# Altium PCB DecodeBufferLatch.PcbDoc
Units mil, origin at the board's own origin, x right, y up, seen from the top; angles counter-clockwise.
Board outline 9055.12 x 3937.01 mil, 2 copper layers (Top Layer, Bottom Layer); 89 components, 61 nets, 309 pads, 40 vias.
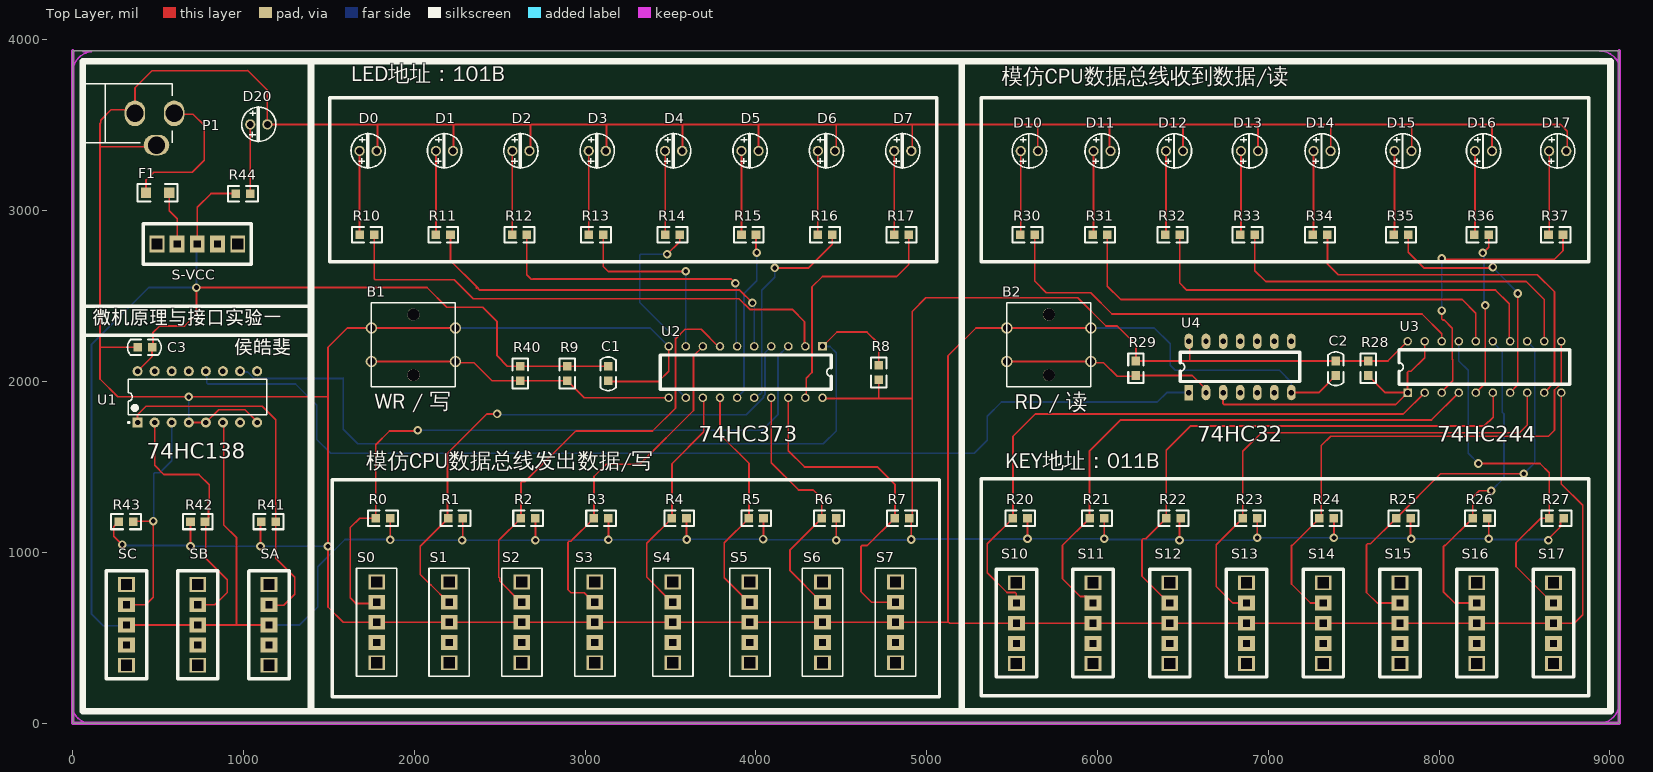
[diagram p0: Top Layer view]
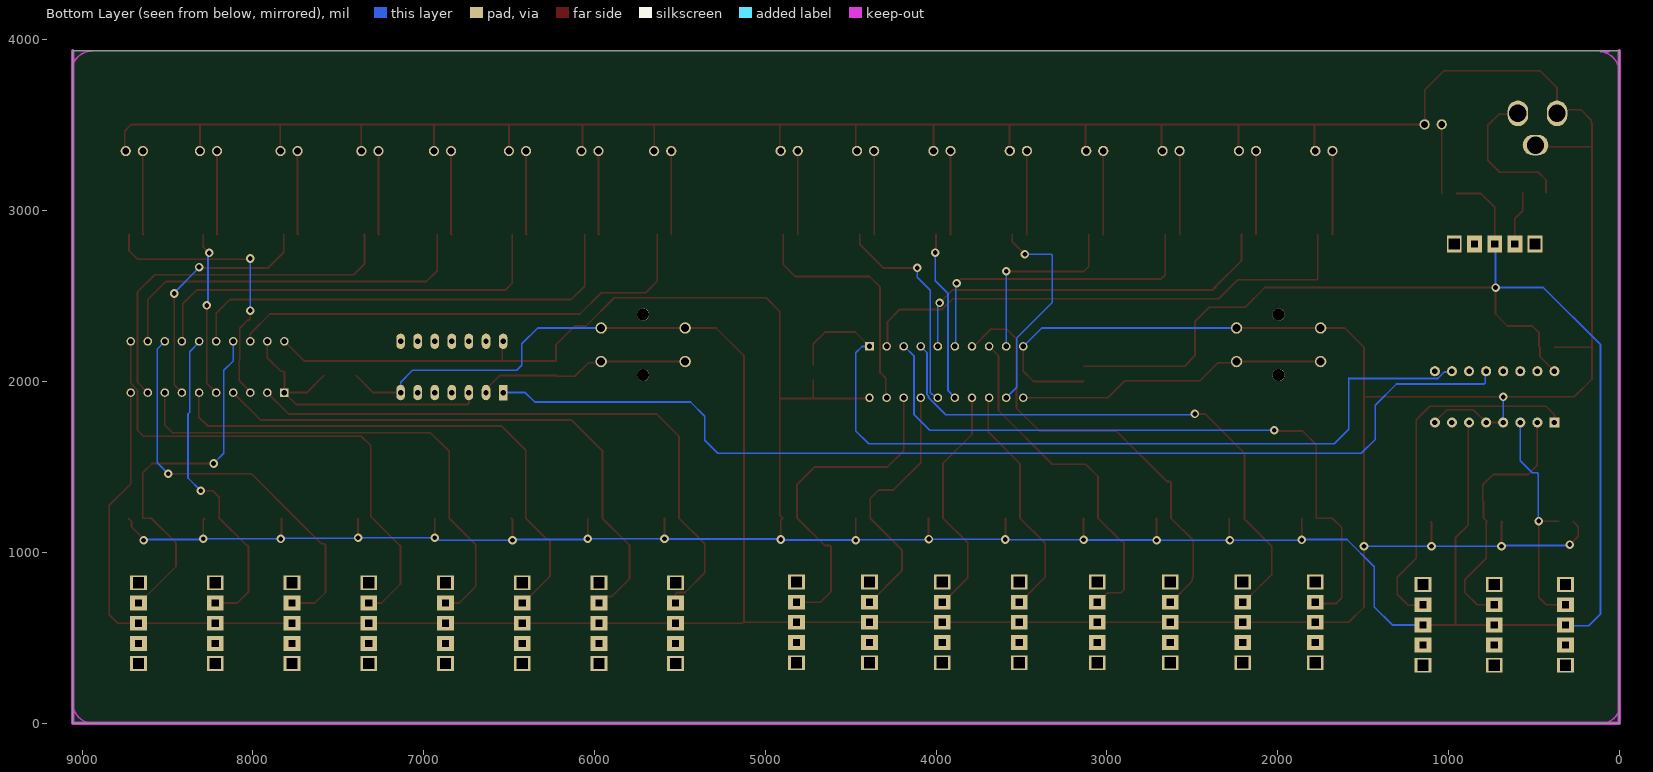
[diagram p1: Bottom Layer view, seen from below]

## Layer stack, top to bottom
Top Solder: solder mask 0.4, Solder Resist, Dk 3.5
Top Layer: signal copper 1.4
Dielectric1: dielectric 12.6, FR-4, Dk 4.8
Bottom Layer: signal copper 1.4
Bottom Solder: solder mask 0.4, Solder Resist, Dk 3.5

## Board outline
0,0 0,3937.01 9055.12,3937.01 9055.12,0

## Design rules (kind name [scope] priority, off if disabled: settings)
Clearance nploy [InPolygon] p1: gap=10 ignorepadtopadclearanceinfootprint=FALSE except(0: Arc-Hole Track-Hole SMDPad-Hole THPad-Hole Via-Hole Fill-Hole Poly-Hole Region-Hole Text-Hole)
Clearance [All] p2: gap=8 ignorepadtopadclearanceinfootprint=FALSE except(0: Arc-Hole Track-Hole SMDPad-Hole THPad-Hole Via-Hole Fill-Hole Poly-Hole Region-Hole Text-Hole)
HoleSize [All] p1: absolutevalues=TRUE maxlimit=500 minlimit=1 maxpercent=80.000 minpercent=20.000
MinimumSolderMaskSliver [All] p1: minsoldermaskwidth=0
PolygonConnect [All] p1: connectstyle=Relief reliefconductorwidth=10 reliefentries=4 polygonreliefangle="90 Angle" airgapwidth=10
RoutingCorners [All] p1: cornerstyle=45-Degree minsetback=200 maxsetback=200
RoutingVias [All] p1: holewidth=20 width=35 viastyle="Through Hole" minholewidth=10 minwidth=10 maxholewidth=30 maxwidth=50
SilkToSilkClearance [All] p1: silktosilkclearance=0
SilkToSolderMaskClearance SilkscreenOverComponentPads [IsPad] p1: minsilkscreentomaskgap=0 clearancetoexposedcopper=TRUE
SolderMaskExpansion [All] p1: expansion=4 istentingtop=FALSE
Width [All] p1: maxlimit=50 minlimit=8 preferedwidth=10
25 further rules are at their usual default settings.

## Components (designator, comment, footprint, x,y, rotation, side; value= is the part's Value field where it differs from the comment)
B1 "SW-SPST" KEY_RESET 1995,2215 r0 top
B2 "SW-SPST" KEY_RESET 5715,2215 r0 top
C1 "104" 0805C 3130,2005 r90 top
C2 "104" 0805C 7390,2035 r90 top
C3 "104" 0805C 380,2205 r0 top
D0 "LED" LED1 1680,3350 r0 top
D1 "LED" LED1 2127.14,3350 r0 top
D2 "LED" LED1 2574.29,3350 r0 top
D3 "LED" LED1 3021.43,3350 r0 top
D4 "LED" LED1 3468.57,3350 r0 top
D5 "LED" LED1 3915.71,3350 r0 top
D6 "LED" LED1 4362.86,3350 r0 top
D7 "LED" LED1 4810,3350 r0 top
D10 "LED" LED1 5550.81,3349.14 r0 top
D11 "LED" LED1 5976.57,3349.14 r0 top
D12 "LED" LED1 6400.59,3349.14 r0 top
D13 "LED" LED1 6839.73,3349.14 r0 top
D14 "LED" LED1 7264.79,3349.14 r0 top
D15 "LED" LED1 7738.05,3349.14 r0 top
D16 "LED" LED1 8209.76,3349.14 r0 top
D17 "LED" LED1 8644,3349.14 r0 top
D20 "LED" LED1 1040,3505 r0 top
F1 "Fuse1A" 1206 565,3105 r180 top
P1 "DC5V_JACK" DCJACK 594,3570 r90 top locked
R0 "10K" 0805 1780,1200 r0 top
R1 "10K" 0805 2204.43,1200 r0 top
R2 "10K" 0805 2629.64,1200 r0 top value=10k
R3 "10K" 0805 3056.88,1200 r0 top value=10k
R4 "10K" 0805 3513.78,1200 r0 top value=10k
R5 "10K" 0805 3964.49,1200 r0 top value=10k
R6 "10K" 0805 4390.22,1200 r0 top value=10k
R7 "10K" 0805 4817.45,1200 r0 top value=10k
R8 "10K" 0805 4720,2090 r270 top
R9 "10K" 0805 2895,2010 r90 top
R10 "330R" 0805 1760,2860 r180 top
R11 "330R" 0805 2207.14,2860 r180 top
R12 "330R" 0805 2654.29,2860 r180 top
R13 "330R" 0805 3101.43,2860 r180 top
R14 "330R" 0805 3548.57,2860 r180 top
R15 "330R" 0805 3995.71,2860 r180 top
R16 "330R" 0805 4442.86,2860 r180 top
R17 "330R" 0805 4890,2860 r180 top
R20 "10K" 0805 5510,1200 r0 top
R21 "10K" 0805 5958.57,1200 r0 top
R22 "10K" 0805 6407.14,1200 r0 top value=10k
R23 "10K" 0805 6855.71,1200 r0 top value=10k
R24 "10K" 0805 7304.29,1200 r0 top value=10k
R25 "10K" 0805 7752.86,1200 r0 top value=10k
R26 "10K" 0805 8201.43,1200 r0 top value=10k
R27 "10K" 0805 8650,1200 r0 top value=10k
R28 "10K" 0805 7585,2040 r90 top
R29 "10K" 0805 6225,2040 r90 top
R30 "330R" 0805 5626.85,2860 r180 top
R31 "330R" 0805 6052.61,2860 r180 top
R32 "330R" 0805 6476.63,2860 r180 top
R33 "330R" 0805 6915.77,2860 r180 top
R34 "330R" 0805 7340.84,2860 r180 top
R35 "330R" 0805 7814.09,2860 r180 top
R36 "330R" 0805 8285.8,2860 r180 top
R37 "330R" 0805 8720.04,2860 r180 top
R40 "10K" 0805 2620,2010 r90 top
R41 "10K" 0805 1185,1180 r180 top
R42 "10K" 0805 770,1180 r180 top
R43 "10K" 0805 350,1180 r180 top value=10k
R44 "10K" 0805 960,3100 r0 top value=330R
S0 "SW-SPST" BM 1780,590 r90 top
S1 "SW-SPST" BM 2204.43,590 r90 top
S2 "SW-SPST" BM 2629.64,590 r90 top
S3 "SW-SPST" BM 3056.88,590 r90 top
S4 "SW-SPST" BM 3513.78,590 r90 top
S5 "SW-SPST" BM 3964.49,590 r90 top
S6 "SW-SPST" BM 4390.22,590 r90 top
S7 "SW-SPST" BM 4817.45,590 r90 top
S10 "SW-SPST" BM 5525,585 r90 top
S11 "SW-SPST" BM 5974.19,585 r90 top
S12 "SW-SPST" BM 6423.38,585 r90 top
S13 "SW-SPST" BM 6872.57,585 r90 top
S14 "SW-SPST" BM 7321.76,585 r90 top
S15 "SW-SPST" BM 7770.95,585 r90 top
S16 "SW-SPST" BM 8220.14,585 r90 top
S17 "SW-SPST" BM 8669.33,585 r90 top
S-VCC "SW-SPST" BM 730,2805 r180 top
SA "SW-SPST" BM 1150,575 r90 top
SB "SW-SPST" BM 732.5,575 r90 top
SC "SW-SPST" BM 315,575 r90 top
U1 "74HC138" DIP-16 730,1910 r90 top
U2 "74HC373" DIP20 4390,2205 r270 top
U3 "74HC244" DIP20 7815,1935 r90 top
U4 "74HC32" DIP14 6535,1935 r90 top

## Footprints (in the part's own frame and the unit in brackets; to place one, negate y for a bottom-side part, rotate by r counter-clockwise, add the part's x,y. Pads: shape width x height; smd on the part's side, far side on the other; paste and mask are expansions set on the pad)
0805 [mil]
  rect 50x50 smd: 1(-5,0) 2(80,0)
  silkscreen extent -50,-45 125,45
0805C [mil]
  rect 50x50 smd: 1(0,-5) 2(85,-5)
  silkscreen extent -59,-50 139,40
1206 [mil]
  rect 60x63.94 smd: 1(0,0) 2(135,0)
  silkscreen extent -50,-50 185,50
BM [mm]
  rect 2.2x2.5 hole 1 square: 1(0,0) 2(3,0) 3(-3,0)
  rect 2.2x2.5 hole 1.6 square: 4(-6,0) 5(6,0)
  silkscreen extent -8,-3 8.05,3
DCJACK [mil]
  oval 150x120 hole 102: 1(0,0) 2(0,229)
  oval 120x150 hole 102: 3(-186,103)
  silkscreen extent -173,12 173,531
DIP14 [mil] "14脚300mil直插集成电路（蒜米工坊）"
  rect 90x50 hole 32: 1(0,0)
  oval 90x50 hole 32: 2(0,-100) 3(0,-200) 4(0,-300) 5(0,-400) 6(0,-500) 7(0,-600) 8(300,-600) 9(300,-500) 10(300,-400) 11(300,-300) 12(300,-200) 13(300,-100) 14(300,0)
  silkscreen extent 65,-650 235,50
DIP20 [mil]
  rect 50x50 hole 32: 1(0,0)
  round 50 hole 32: 2(0,-100) 3(0,-200) 4(0,-300) 5(0,-400) 6(0,-500) 7(0,-600) 8(0,-700) 9(0,-800) 10(0,-900) 11(300,-900) 12(300,-800) 13(300,-700) 14(300,-600) 15(300,-500) 16(300,-400) 17(300,-300) 18(300,-200) 19(300,-100) 20(300,0)
  silkscreen extent 50,-950 250,50
DIP-16 [mm] "DIP; 16 Leads; Row Spacing 7.62 mm; Pitch 2.54 mm"
  rect 1.5x1.5 hole 0.813: 1(-3.81,8.89)
  round 1.5 hole 0.813: 2(-3.81,6.35) 3(-3.81,3.81) 4(-3.81,1.27) 5(-3.81,-1.27) 6(-3.81,-3.81) 7(-3.81,-6.35) 8(-3.81,-8.89) 9(3.81,-8.89) 10(3.81,-6.35) 11(3.81,-3.81) 12(3.81,-1.27) 13(3.81,1.27) 14(3.81,3.81) 15(3.81,6.35) 16(3.81,8.89)
  silkscreen extent -3.93,-10.3 2.65,10.31, body extent -3.6,-10.28 3.6,10.28, height 5.08
KEY_RESET [mm] "12mmx12mmx7mm微动拨码开关"
  round 1.7 hole 1.2: 1(-6.25,2.5) 1(6.25,2.5) 2(-6.25,-2.5) 2(6.25,-2.5)
  round 1.8 hole 1.8: ""(0,-4.5) ""(0,4.5)
  silkscreen extent -6.25,-6.25 6.25,6.25
LED1 [mil]
  round 60 hole 40: 1(0,0) 2(100,0)
  silkscreen extent -50,-99 150,101

## Part data
B1 B2 S0 S1 S2 S3 S4 S5 S6 S7 S10 S11 S12 S13 S14 S15 S16 S17 S-VCC SA SB SC: "Single-Pole, Single-Throw Switch", LatestRevisionDate=17-Jul-2002, LatestRevisionNote="Re-released for DXP Platform.", PackageDescription="Switch; 2 Leads", PackageReference=SPST-2, Published=24-Mar-1999, Publisher="Altium Limited"
C1 C2 C3: library part Cap, "Capacitor", LatestRevisionDate=17-Jul-2002, LatestRevisionNote="Re-released for DXP Platform.", PackageReference=RAD-0.3, Published=8-Jun-2000, Publisher="Altium Limited"
D0 D1 D2 D3 D4 D5 D6 D7 D10 D11 D12 D13 D14 D15 D16 D17 D20: library part "Diode 1N4148", "High Conductance Fast Diode", Code_JEDEC=DO-204-AH, ComponentLink1Description="Manufacturer Link", ComponentLink1URL=http://www.fairchildsemi.com/, ComponentLink2Description=Datasheet, ComponentLink2URL=http://www.fairchildsemi.com/ds/1N%2F1N4148.pdf, DatasheetVersion=1997, LatestRevisionDate=17-Jul-2002, LatestRevisionNote="Re-released for DXP Platform.", PackageDescription="Diode, Axial; Body 3.8 x 1.9 mm (LxDia. max), Lead Dia. 0.53 mm (max)", PackageReference=DO-35, Published=8-Jun-2000, Publisher="Altium Limited"
F1: library part "Fuse 1", "Fuse", LatestRevisionDate=17-Jul-2002, LatestRevisionNote="Re-released for DXP Platform.", PackageDescription="Thru-Hole; 2 Leads", PackageReference=PIN-W2/E2.8, Published=8-Jun-2000, Publisher="Altium Limited"
P1: library part "Header 3", "Header, 3-Pin", LatestRevisionDate=17-Jul-2002, LatestRevisionNote="Re-released for DXP Platform.", Publisher="Altium Limited"
R0 R1 R2 R3 R4 R5 R6 R7 R8 R9 R10 R11 R12 R13 R14 R15 R16 R17 R20 R21 R22 R23 R24 R25 R26 R27 R28 R29 R30 R31 R32 R33 R34 R35 R36 R37 R40 R41 R42 R43 R44: library part Res1, "Resistor", LatestRevisionDate=17-Jul-2002, LatestRevisionNote="Re-released for DXP Platform.", PackageDescription="Axial Device, Thru-Hole; 2 Leads; 0.3 in Pin Spacing", PackageReference=AXIAL-0.3, Published=8-Jun-2000, Publisher="Altium Limited"
U1: library part 74ALS138
U2: library part 74LS373
U3: library part 74LS244
U4: "TI"

## Via types
v1: diameter 50, hole 28, Top Layer to Bottom Layer, 40 vias

## Nets (pads, with @x,y where several pads share a name; then routed paths per layer and width w, separated by ;. In a path a pad name is that pad's centre, name@x,y a point inside that pad or via, vN(x,y) a via of type N, cw(c..) or ccw(c..) an arc to the next point about the centre after c; other vN are vias at no path point)
5V: C1.2 C2.2 C3.2 R0.2 R1.2 R2.2 R3.2 R4.2 R5.2 R6.2 R7.2 R8.2 R9.2 R20.2 R21.2 R22.2 R23.2 R24.2 R25.2 R26.2 R27.2 R28.2 R29.2 R40.2 R44.1 S-VCC.1 SA.1 SB.1 SC.1 U1.6 U1.16 U2.20 U3.20 U4.14 | length 23870.9
  Top Layer w10: SC.1 SB.1 960,575 ; U1.16 465,2145 C3.2 470,2205 470,2285 510,2325 655,2325 725,2395 v1(725,2550) 2075,2550 2190,2435 2400,2435 2485,2350 2485,2150 2545,2090 R40.2 R9.2 C1.2 ; S-VCC.1 730,3020 810,3100 R44.1 ; U1.6 885,1755 885,1160 960,1085 960,575 ; SA.1 960,575 ; v1@1860,1070 v1(1860,1072.5) 1860,1075 R0.2 ; v1(2280,1070) 2284.43,1074.43 R1.2 ; R2.2 v1(2709.64,1070.36) v1@2710,1070 ; R3.2 v1(3136.88,1073.12) v1@3140,1070 ; R4.2 3593.78,1076.22 v1(3595,1075) ; v1@4040,1075 v1(4042.24,1077.24) 4044.49,1079.49 R5.2 ; U2.20 4395,1900 4720,1900 ; v1@4470,1070 v1(4470.22,1070.22) R6.2 ; R8.2 4720,1900 ; v1(4910,1075) 4910,1187.45 R7.2 4915,1217.55 4915,1900 ; v1(5590,1080) R20.2 ; v1@6030,1085 6038.57,1093.57 R21.2 ; v1(6480,1070) 6480,1192.86 R22.2 ; U4.14 6540,2230 6540,2120 ; v1@6935,1085 v1(6935.71,1085.71) R23.2 ; R24.2 v1(7384.29,1085.71) v1@7390,1080 ; U3.20 7700,2120 R28.2 6540,2120 ; R25.2 7832.86,1082.14 v1(7836.43,1078.57) v1@7840,1075 ; R26.2 8290,1191.43 v1(8290,1080) ; v1@8640,1080 8710,1150 8710,1180 R27.2 ; 4720,1900 4915,1900 ; 4915,1900 4915,2410 4995,2490 5885,2490 6050,2325 6115,2325 6225,2215 R29.2 6540,2120
  Bottom Layer w10: SC.1 310,570 180,570 110,640 110,2215 445,2550 v1(725,2550) 725,2800 S-VCC.1 ; SA.1 1330,575 1435,680 1435,915 1595,1075 1857.5,1075 v1(1860,1072.5) 1861.25,1071.25 2278.75,1071.25 v1(2280,1070) 2280.18,1070.18 2709.47,1070.18 v1(2709.64,1070.36) 2711.03,1071.74 3135.49,1071.74 v1(3136.88,1073.12) 3137.82,1074.06 3594.06,1074.06 v1(3595,1075) 3596.12,1076.12 4041.12,1076.12 v1(4042.24,1077.24) 4045.75,1073.73 4466.71,1073.73 v1(4470.22,1070.22) 4472.61,1072.61 4907.61,1072.61 v1(4910,1075) 4912.5,1077.5 5587.5,1077.5 v1(5590,1080) 6040,1080 6045,1075 6475,1075 v1(6480,1070) 6909.18,1070 6924.89,1085.71 v1(6935.71,1085.71) v1(7384.29,1085.71) 7387.86,1082.14 7832.86,1082.14 v1(7836.43,1078.57) 7837.14,1079.29 8289.29,1079.29 v1(8290,1080) 8295,1075 8635,1075 v1(8640,1070) ; v1@8640,1080 v1@8645,1075
  other v1: 6040,1080
A: R41.1 SA.2 U1.1 | length 2152.6
  Top Layer w10: U1.1 380,1805 430,1855 1110,1855 1190,1775 R41.1 1190,965 1300,855 1300,755 1235,690 1153.11,690 SA.2
B: R42.1 SB.2 U1.2 | length 1514.1
  Top Layer w10: U1.2 480,1510 535,1455 740,1455 800,1395 800,1300 795,1295 795,1200 R42.1 780,1175 780,965 905,840 905,765 833.11,693.11 SB.2
C: R43.1 SC.2 U1.3 | length 1382.1
  Top Layer w10: SC.2 428.11,693.11 472.5,737.5 v1(472.5,1182.5) 357.5,1182.5 R43.1
  Bottom Layer w10: v1@470,1180 v1(472.5,1182.5) 475,1185 475,1459.14 480.86,1465 510,1465 580,1535 U1.3
CS244: U1.12 U4.1 | length 6340
  Bottom Layer w10: U1.12 785,2055 785,1990.86 790.86,1985 1305,1985 1430,1860 1430,1660 1510.86,1579.14 5279.14,1579.14 5355,1655 5355,1795 5354.14,1795.86 5438.28,1880 6350,1880 6405,1935 U4.1
CS244_RD: R28.1 U3.1 U3.19 U4.3 | length 1796.7
  Top Layer w10: U4.3 6735,1870.86 6740.86,1865 7745,1865 U3.1 ; R28.1 7685,1935 U3.1 ; U3.19 7915,2140 7835,2060 7820.86,2060 7815,2054.14 U3.1
CS373: R8.1 U1.10 U2.1 | length 4948.1
  Top Layer w10: U2.1 4475,2290 4650,2290 4720,2220 R8.1
  Bottom Layer w10: U1.10 984.67,2055.33 1024.53,2055.33 1062.38,2017.47 1582.47,2017.47 1585,2020 1585,1720 1670,1635 4395,1635 4470,1710 4470,2169.14 4434.14,2205 U2.1
DB0: R30.1 U3.18 | length 2827.6
  Top Layer w10: R30.1 5631.85,2588.15 5700,2520 5960,2520 6085,2395 7900,2395 8015,2280 U3.18
DB0-: R0.1 S0.2 U2.3 | length 4041.4
  Top Layer w10: S0.2 1772.75,700.86 1655,700.86 1655,705 1625,735 1625,1145 1680,1200 R0.1 1775,1630 1855,1710 2015,1710 v1(2020,1715)
  Bottom Layer w10: v1(2020,1715) 4036.72,1715 4130.86,1809.14 4130,1810 4130,2150 4185,2205 U2.3
DB1: R31.1 U3.16 | length 2690.1
  Top Layer w10: R31.1 6057.61,2557.61 6135.22,2480 8135,2480 8215,2400 U3.16
DB1-: R1.1 S1.2 U2.4 | length 3323.1
  Top Layer w10: S1.2 2198.53,708.11 2098.43,808.21 2096.79,808.21 2035,870 2035,1035.57 R1.1 2195,1204.43 2195,1580 2315,1700 2425,1810 v1(2485,1810)
  Bottom Layer w10: v1(2485,1810) 2490,1805 3943.74,1805 4044.04,1905.3 4044.04,1912.78 4053,1921.74 4053,2168 U2.4
DB2: R32.1 U3.14 | length 2484.2
  Top Layer w10: R32.1 6481.63,2576.63 6523.27,2535 8330,2535 8410,2455 8410,2240 U3.14
DB2-: R2.1 S2.2 U2.7 | length 2628.9
  Top Layer w10: S2.2 2623.74,708.11 2500,831.85 2500,850 2495,855 2495,1070.36 R2.1 2625,1200.36 2625,1409.14 2630.86,1415 2650,1415 2945,1710 3395,1710 3530,1845 3530,2250 3585,2305 3680,2305 3780,2205 U2.7
DB3: R33.1 U3.12 | length 2220.1
  Top Layer w10: R33.1 6920.77,2649.23 6985,2585 8510,2585 8615,2480 U3.12
DB3-: R3.1 S3.2 U2.8 | length 2060.8
  Top Layer w10: S3.2 3050.97,708.11 2995.44,763.64 2917.22,763.64 2900,780.86 2900,1059.14 2905.86,1065 2916.88,1065 R3.1 3051.88,1443.59 3124.14,1515.86 3125,1515 3320,1515 3634.9,1829.9 3634.9,2149.9 U2.8
DB4: R34.1 U3.9 | length 2182.9
  Top Layer w10: R34.1 7345.84,2689.16 7410,2625 8575,2625 8675,2525 8675,1995 U3.9
DB4-: R4.1 S4.2 U2.13 | length 1405.9
  Top Layer w10: S4.2 3507.87,708.11 3360.86,855.13 3360.86,1055 3363.78,1055 R4.1 3508.78,1518.78 3695,1705 3695,1900 U2.13
DB5: R35.1 U3.7 | length 1453.4
  Top Layer w10: R35.1 7819.09,2755.91 7910,2665 8310,2665 v1(8315,2670) ; U3.7 8460,1980 v1(8460,2515)
  Bottom Layer w10: v1(8315,2670) 8315,2665 8460,2520 v1(8460,2515)
DB5-: R5.1 S5.2 U2.14 | length 1392.3
  Top Layer w10: U2.14 3790,1690 3959.49,1520.51 R5.1 3815,1055.51 3815,851.69 3958.58,708.11 S5.2
DB6: R36.1 U3.5 | length 970.6
  Top Layer w10: U3.5 8270,1990 v1(8270,2445) ; v1(8255,2753) 8258,2753 8290.8,2785.8 R36.1
  Bottom Layer w10: v1(8255,2753) 8255,2750 8262.5,2742.5 8262.5,2452.5 v1(8270,2445)
DB6-: R6.1 S6.2 U2.17 | length 1527.8
  Top Layer w10: U2.17 4090,1525 4250,1365 4335,1365 4385,1315 4385,1200.22 R6.1 4200.22,1015 4200.22,892.2 4384.32,708.11 S6.2
DB7: R37.1 U3.3 | length 1671.4
  Top Layer w10: U3.3 8015,1940 8080,2005 8080,2126.37 8077,2129.37 8077,2312 8029,2360 8020.86,2360 8015,2365.86 v1(8015,2415) ; v1(8015,2720) 8020,2715 8675,2715 8725.04,2765.04 R37.1
  Bottom Layer w10: v1(8015,2415) v1(8015,2720)
DB7-: R7.1 S7.2 U2.18 | length 1972.3
  Top Layer w10: U2.18 4190,1595 4285,1500 4710,1500 4815,1395 4815,1202.55 R7.1 4652.45,1040 4620.86,1040 4615,1034.14 4615,770 4676.89,708.11 S7.2
GND: B1.1 B2.1 C1.1 C2.1 C3.1 D0.2 D1.2 D2.2 D3.2 D4.2 D5.2 D6.2 D7.2 D10.2 D11.2 D12.2 D13.2 D14.2 D15.2 D16.2 D17.2 D20.2 P1.2 P1.3 R41.2 R42.2 R43.2 S0.1 S1.1 S2.1 S3.1 S4.1 S5.1 S6.1 S7.1 S10.1 S11.1 S12.1 S13.1 S14.1 S15.1 S16.1 S17.1 U1.4 U1.5 U1.8 U2.10 U3.10 U4.7 | length 34377.5
  Top Layer w10: R43.2 240,1150 240,1095 v1(290,1045) ; C3.1 160,2200 ; P1.3 482,3375 160,3375 ; U1.4 U1.5 855,1835 1009.14,1835 1080,1764.14 U1.8 ; v1(690,1035) 690,1170 685,1175 R42.2 ; v1(1100,1035) 1100,1175 R41.2 ; D0.2 1785,3355 1785,3505 ; D1.2 2230,3352.86 2230,3505 ; B1.1@2241.06,2313.42 1748.94,2313.42 1608.42,2313.42 1495,2200 1495,1910 ; D2.2 2680,3355.71 2680,3505 ; D3.2 3125,3353.57 3125,3505 ; C1.1 3140,2000 3430,2000 3490,2060 U2.10 ; D4.2 3570,3351.43 3570,3505 ; D5.2 4015,3350.71 4015,3505 ; D6.2 4470,3357.14 4470,3505 ; D7.2 4915,3355 4915,3505 ; D10.2 5650,3349.95 5650,3505 ; B2.1@5961.06,2313.42 5468.94,2313.42 5288.42,2313.42 5125,2150 5125,595 ; D11.2 6070,3355.71 6070,3505 ; D12.2 6500,3349.74 6500,3505 ; D13.2 6940,3349.41 6940,3505 ; U4.7 7295,1935 C2.1 ; D14.2 7365,3349.35 7365,3505 ; D15.2 7840,3351.1 7840,3505 ; D16.2 8310,3349.38 8310,3505 ; U3.10 8715,1400 8840,1275 8840,635 8790,585 S17.1 S16.1 S15.1 S14.1 S13.1 S12.1 S11.1 S10.1 5135,585 5125,595 ; D17.2 8750,3355.14 8750,3465 8710,3505 8310,3505 ; 160,2200 160,3375 ; 160,2200 160,2015 265,1910 v1(680,1910) 1495,1910 ; 160,3375 160,3510 165,3515 165,3530 225,3590 345,3590 P1.2 365,3720 465,3820 1025,3820 1025.86,3820.86 1140,3706.72 D20.2 1785,3505 ; 1495,1910 v1(1495,1035) 1495,680 1585,590 S0.1 S1.1 S2.1 S3.1 S4.1 S5.1 S6.1 S7.1 5125,590 5125,595 ; 1785,3505 2230,3505 ; 2230,3505 2680,3505 ; 2680,3505 3125,3505 ; 3125,3505 3570,3505 ; 3570,3505 4015,3505 ; 4015,3505 4470,3505 ; 4470,3505 4915,3505 ; 4915,3505 5650,3505 ; 5650,3505 6070,3505 ; 6070,3505 6500,3505 ; 6500,3505 6940,3505 ; 6940,3505 7365,3505 ; 7365,3505 7840,3505 ; 7840,3505 8310,3505
  Bottom Layer w10: v1(290,1045) 295,1040 685,1040 v1(690,1035) v1(1100,1035) v1(1495,1035) ; U1.4 v1(680,1910) ; B1.1@2241.06,2313.42 3381.58,2313.42 U2.10 ; B2.1@5961.06,2313.42 6331.58,2313.42 6425,2220 6425,2095 6455,2065 7065,2065 7135,1995 U4.7
K0: R20.1 S10.2 U3.2 | length 3653.6
  Top Layer w10: S10.2 5525,759.06 5519.14,764.91 5470.4,764.91 5355,880.32 5355,1050 R20.1 5505,1680 5635,1810 7790,1810 U3.2
K1: R21.1 S11.2 U3.4 | length 3355.1
  Top Layer w10: S11.2 5935.88,741.42 5898.58,741.42 5795,845 5795,1041.43 R21.1 5953.57,1593.57 6135,1775 7955,1775 U3.4
K2: R22.1 S12.2 U3.6 | length 3172
  Top Layer w10: S12.2 6417.47,703.11 6260,860.58 6260,1074.14 6265.86,1080 6282.14,1080 R22.1 6402.14,1597.14 6545,1740 8265,1740 8315.86,1790.86 8315.86,1934.14 U3.6
K3: R23.1 S13.2 U3.8 | length 2991.1
  Top Layer w10: S13.2 6791.89,703.11 6695,800 6695,1044.29 R23.1 6850.71,1590.71 6960,1700 8470,1700 8515,1745 U3.8
K4: R24.1 S14.2 U3.11 | length 3056.4
  Top Layer w10: S14.2 7246.89,703.11 7135.86,814.14 7135.86,1040 7139.29,1040 R24.1 7310,1210.71 7310,1625 7365,1680 8640,1680 8675.86,1715.86 8675.86,1724.14 8675,1725 8675,1950 8715,1990 U3.11
K5: R25.1 S15.2 U3.13 | length 2413.5
  Top Layer w10: S15.2 7636.89,703.11 7575,765 7575,1044.14 7580.86,1050 7597.86,1050 R25.1 8007.86,1460 v1(8495,1460)
  Bottom Layer w10: v1(8495,1460) 8560,1525 8560,2190 U3.13
K6: R26.1 S16.2 U3.15 | length 1906.1
  Top Layer w10: S16.2 8091.89,703.11 8025,770 8025,1034.14 8030.86,1040 8036.43,1040 R26.1 8196.43,1321.43 8235,1360 v1(8305,1360)
  Bottom Layer w10: v1(8305,1360) 8380,1435 8380,1810 8370,1820 8370,2175 8315,2230 U3.15
K7: R27.1 S17.2 U3.17 | length 2166.7
  Top Layer w10: v1(8230,1520) 8590,1520 8645,1465 R27.1 8595,1200 8450,1055 8450,916.54 8663.43,703.11 S17.2
  Bottom Layer w10: U3.17 8115,2120 8170,2065 8170,1580 v1(8230,1520)
L0: R10.1 U2.2 | length 3030.8
  Top Layer w10: R10.1 1765,2600.86 1770.86,2595 2225,2595 2225.86,2595.86 2234.14,2595.86 2345,2485 3901.26,2485 3964.26,2422 4213,2422 4285,2350 4285,2210 U2.2
L1: R11.1 U2.5 | length 2292.5
  Top Layer w10: R11.1 2212.14,2707.14 2365,2554.29 ; 2365,2545 2365,2554.29 ; v1(3980,2460) 3905,2535 2384.29,2535 2365,2554.29
  Bottom Layer w10: v1(3980,2460) 3991.25,2448.75 3991.25,2206.25 U2.5
L2: R12.1 U2.6 | length 1850.9
  Top Layer w10: R12.1 2659.29,2625.71 2685.86,2599.14 2694.14,2599.14 2695,2600 3855,2600 v1(3880,2575)
  Bottom Layer w10: v1(3880,2575) 3885,2570 3885,2210 U2.6
L3: R13.1 U2.9 | length 1133.2
  Top Layer w10: R13.1 3106.43,2673.57 3135.86,2644.14 3589.14,2644.14 v1(3590,2645)
  Bottom Layer w10: v1(3590,2645) U2.9 U2.9@3593.12,2208.12 ; v1@3593.12,2645.62 3596.25,2648.75 v1@3597.5,2647.5
L4: R14.1 U2.12 | length 1253.9
  Top Layer w10: v1(3480,2745) 3553.57,2818.57 R14.1
  Bottom Layer w10: v1(3480,2745) 3325.86,2745 3320,2739.14 3320,2462.48 3528,2254.48 3528,1967 U2.12
L5: R15.1 U2.15 | length 1004.4
  Top Layer w10: R15.1 4000.71,2759.29 v1(4005,2755)
  Bottom Layer w10: U2.15 3930,1945 3930,2514.24 4005,2589.24 v1(4005,2755)
L6: R16.1 U2.16 | length 1270.6
  Top Layer w10: v1(4110,2665) 4309.93,2665 4447.86,2802.93 R16.1
  Bottom Layer w10: U2.16 4000.82,1905 4022.62,1926.8 4026.8,1926.8 4035,1935 4035,2535 4110,2610 v1(4110,2665)
L7: R17.1 U2.19 | length 1460.4
  Top Layer w10: U2.19 4294.14,1909.14 4294.14,2019.14 4328,2053 4328,2553 4390,2615 4825,2615 4895,2685 R17.1
NetD0_1: D0.1 R10.2 | length 490
  Top Layer w10: R10.2 D0.1
NetD1_1: D1.1 R11.2 | length 490
  Top Layer w10: R11.2 D1.1
NetD2_1: D2.1 R12.2 | length 490
  Top Layer w10: R12.2 D2.1
NetD3_1: D3.1 R13.2 | length 490
  Top Layer w10: R13.2 D3.1
NetD4_1: D4.1 R14.2 | length 490
  Top Layer w10: R14.2 D4.1
NetD5_1: D5.1 R15.2 | length 490
  Top Layer w10: R15.2 D5.1
NetD6_1: D6.1 R16.2 | length 490
  Top Layer w10: R16.2 D6.1
NetD7_1: D7.1 R17.2 | length 490
  Top Layer w10: R17.2@4810,2860 D7.1
NetD10_1: D10.1 R30.2 | length 490.8
  Top Layer w10: R30.2 5550.81,2863.96 D10.1
NetD11_1: D11.1 R31.2 | length 490.8
  Top Layer w10: R31.2 5976.57,2863.96 D11.1
NetD12_1: D12.1 R32.2 | length 490.8
  Top Layer w10: R32.2 6400.59,2863.96 D12.1
NetD13_1: D13.1 R33.2 | length 490.8
  Top Layer w10: R33.2 6839.73,2863.96 D13.1
NetD14_1: D14.1 R34.2 | length 490.8
  Top Layer w10: R34.2 7264.79,2863.96 D14.1
NetD15_1: D15.1 R35.2 | length 490.8
  Top Layer w10: R35.2 7738.05,2863.96 D15.1
NetD16_1: D16.1 R36.2 | length 490.8
  Top Layer w10: R36.2 8209.76,2863.96 D16.1
NetD17_1: D17.1 R37.2 | length 490.8
  Top Layer w10: R37.2 8644,2863.96 D17.1
NetD20_1: D20.1 R44.2 | length 405
  Top Layer w10: R44.2 D20.1
NetF1_1: F1.1 S-VCC.2 | length 319.4
  Top Layer w10: F1.1 565,3000 611.89,2953.11 S-VCC.2
NetF1_2: F1.2 P1.1 | length 872.6
  Top Layer w10: F1.2 430,3180 475,3225 700,3225 770,3295 770,3500 705,3565 599,3565 P1.1
RD: B2.2 R29.1 U4.2 | length 1257.1
  Top Layer w10: B2.2@5468.94,2116.57 5961.06,2116.57 5967.64,2110 6035,2110 6115,2030 6220,2030 R29.1 6555,2035 6635,1955 U4.2
WR: B1.2 R9.1 R40.1 U2.11 | length 1828.7
  Top Layer w10: B1.2@1748.94,2116.57 2241.06,2116.57 2247.64,2110 2350,2110 2455,2005 R40.1 R9.1 2995,1905 U2.11
pads on no net: B1. B2. S0.3 S0.4 S0.5 S1.3 S1.4 S1.5 S2.3 S2.4 S2.5 S3.3 S3.4 S3.5 S4.3 S4.4 S4.5 S5.3 S5.4 S5.5 S6.3 S6.4 S6.5 S7.3 S7.4 S7.5 S10.3 S10.4 S10.5 S11.3 S11.4 S11.5 S12.3 S12.4 S12.5 S13.3 S13.4 S13.5 S14.3 S14.4 S14.5 S15.3 S15.4 S15.5 S16.3 S16.4 S16.5 S17.3 S17.4 S17.5 S-VCC.3 S-VCC.4 S-VCC.5 SA.3 SA.4 SA.5 SB.3 SB.4 SB.5 SC.3 SC.4 SC.5 U1.7 U1.9 U1.11 U1.13 U1.14 U1.15 U4.4 U4.5 U4.6 U4.8 U4.9 U4.10 U4.11 U4.12 U4.13

## Keep-outs
Keep-Out Layer:
  lines w10: -5,95 ccw(c117.57,119.51) 117.57,-5.49 ; -0.49,3807.43 cw(c124.51,3807.43) 100,3930 ; 60,3930 110,3930 ; 8937.43,3935.49 cw(c8937.43,3810.49) 9060,3835 ; 8955,0 ccw(c8930.49,122.57) 9055.49,122.57
  lines w20: 0,3937.01 0,0 9055.12,0 9055.12,3937.01

## Silkscreen, mask and mechanical layers (free items; w line width, h text height)
Top Overlay:
  lines w19.84: 60,2270 1385,2270 ; 65,2440 1390,2440
  lines w20: 1505,2700 1505,3660 5060,3660 5060,2700 1505,2700 ; 1520,155 1520,1425 5075,1425 5075,155 1520,155 ; 5320,160 8875,160 8875,1430 5320,1430 5320,160 ; 5320,2700 8875,2700 8875,3660 5320,3660 5320,2700
  lines w39.37: 60,3874.61 9002.64,3874.61 ; 60,3875 60,70 5205,70 ; 1395,70 1395,3875 ; 5205,3875 5205,70 ; 9002.64,3875 9002.64,70 5205,70
  text "LED地址：101B" at 1630,3724.37 h157.48
  text "模仿CPU数据总线收到数据/读" at 5440,3710 h157.48
  text "微机原理与接口实验一" at 115,2310 h137.8
  text "侯皓斐" at 945,2135 h137.8
  text "WR / 写" at 1770,1809.37 h157.48
  text "RD / 读" at 5515,1805 h157.48
  text "74HC373" at 3665,1615 h157.48
  text "74HC32" at 6585,1615 h157.48
  text "74HC244" at 7990,1615 h157.48
  text "74HC138" at 435,1515 h157.48
  text "模仿CPU数据总线发出数据/写" at 1720,1460 h157.48
  text "KEY地址：011B" at 5460,1459.37 h157.48